# Altium PCB 333.PcbDoc (part 2 of 4)
Units mil, origin at the board's own origin, x right, y up, seen from the top; angles counter-clockwise.
Board outline 3897.64 x 5283.46 mil, 2 copper layers (Top Layer, Bottom Layer); 160 components, 17 nets, 480 pads, 300 vias.
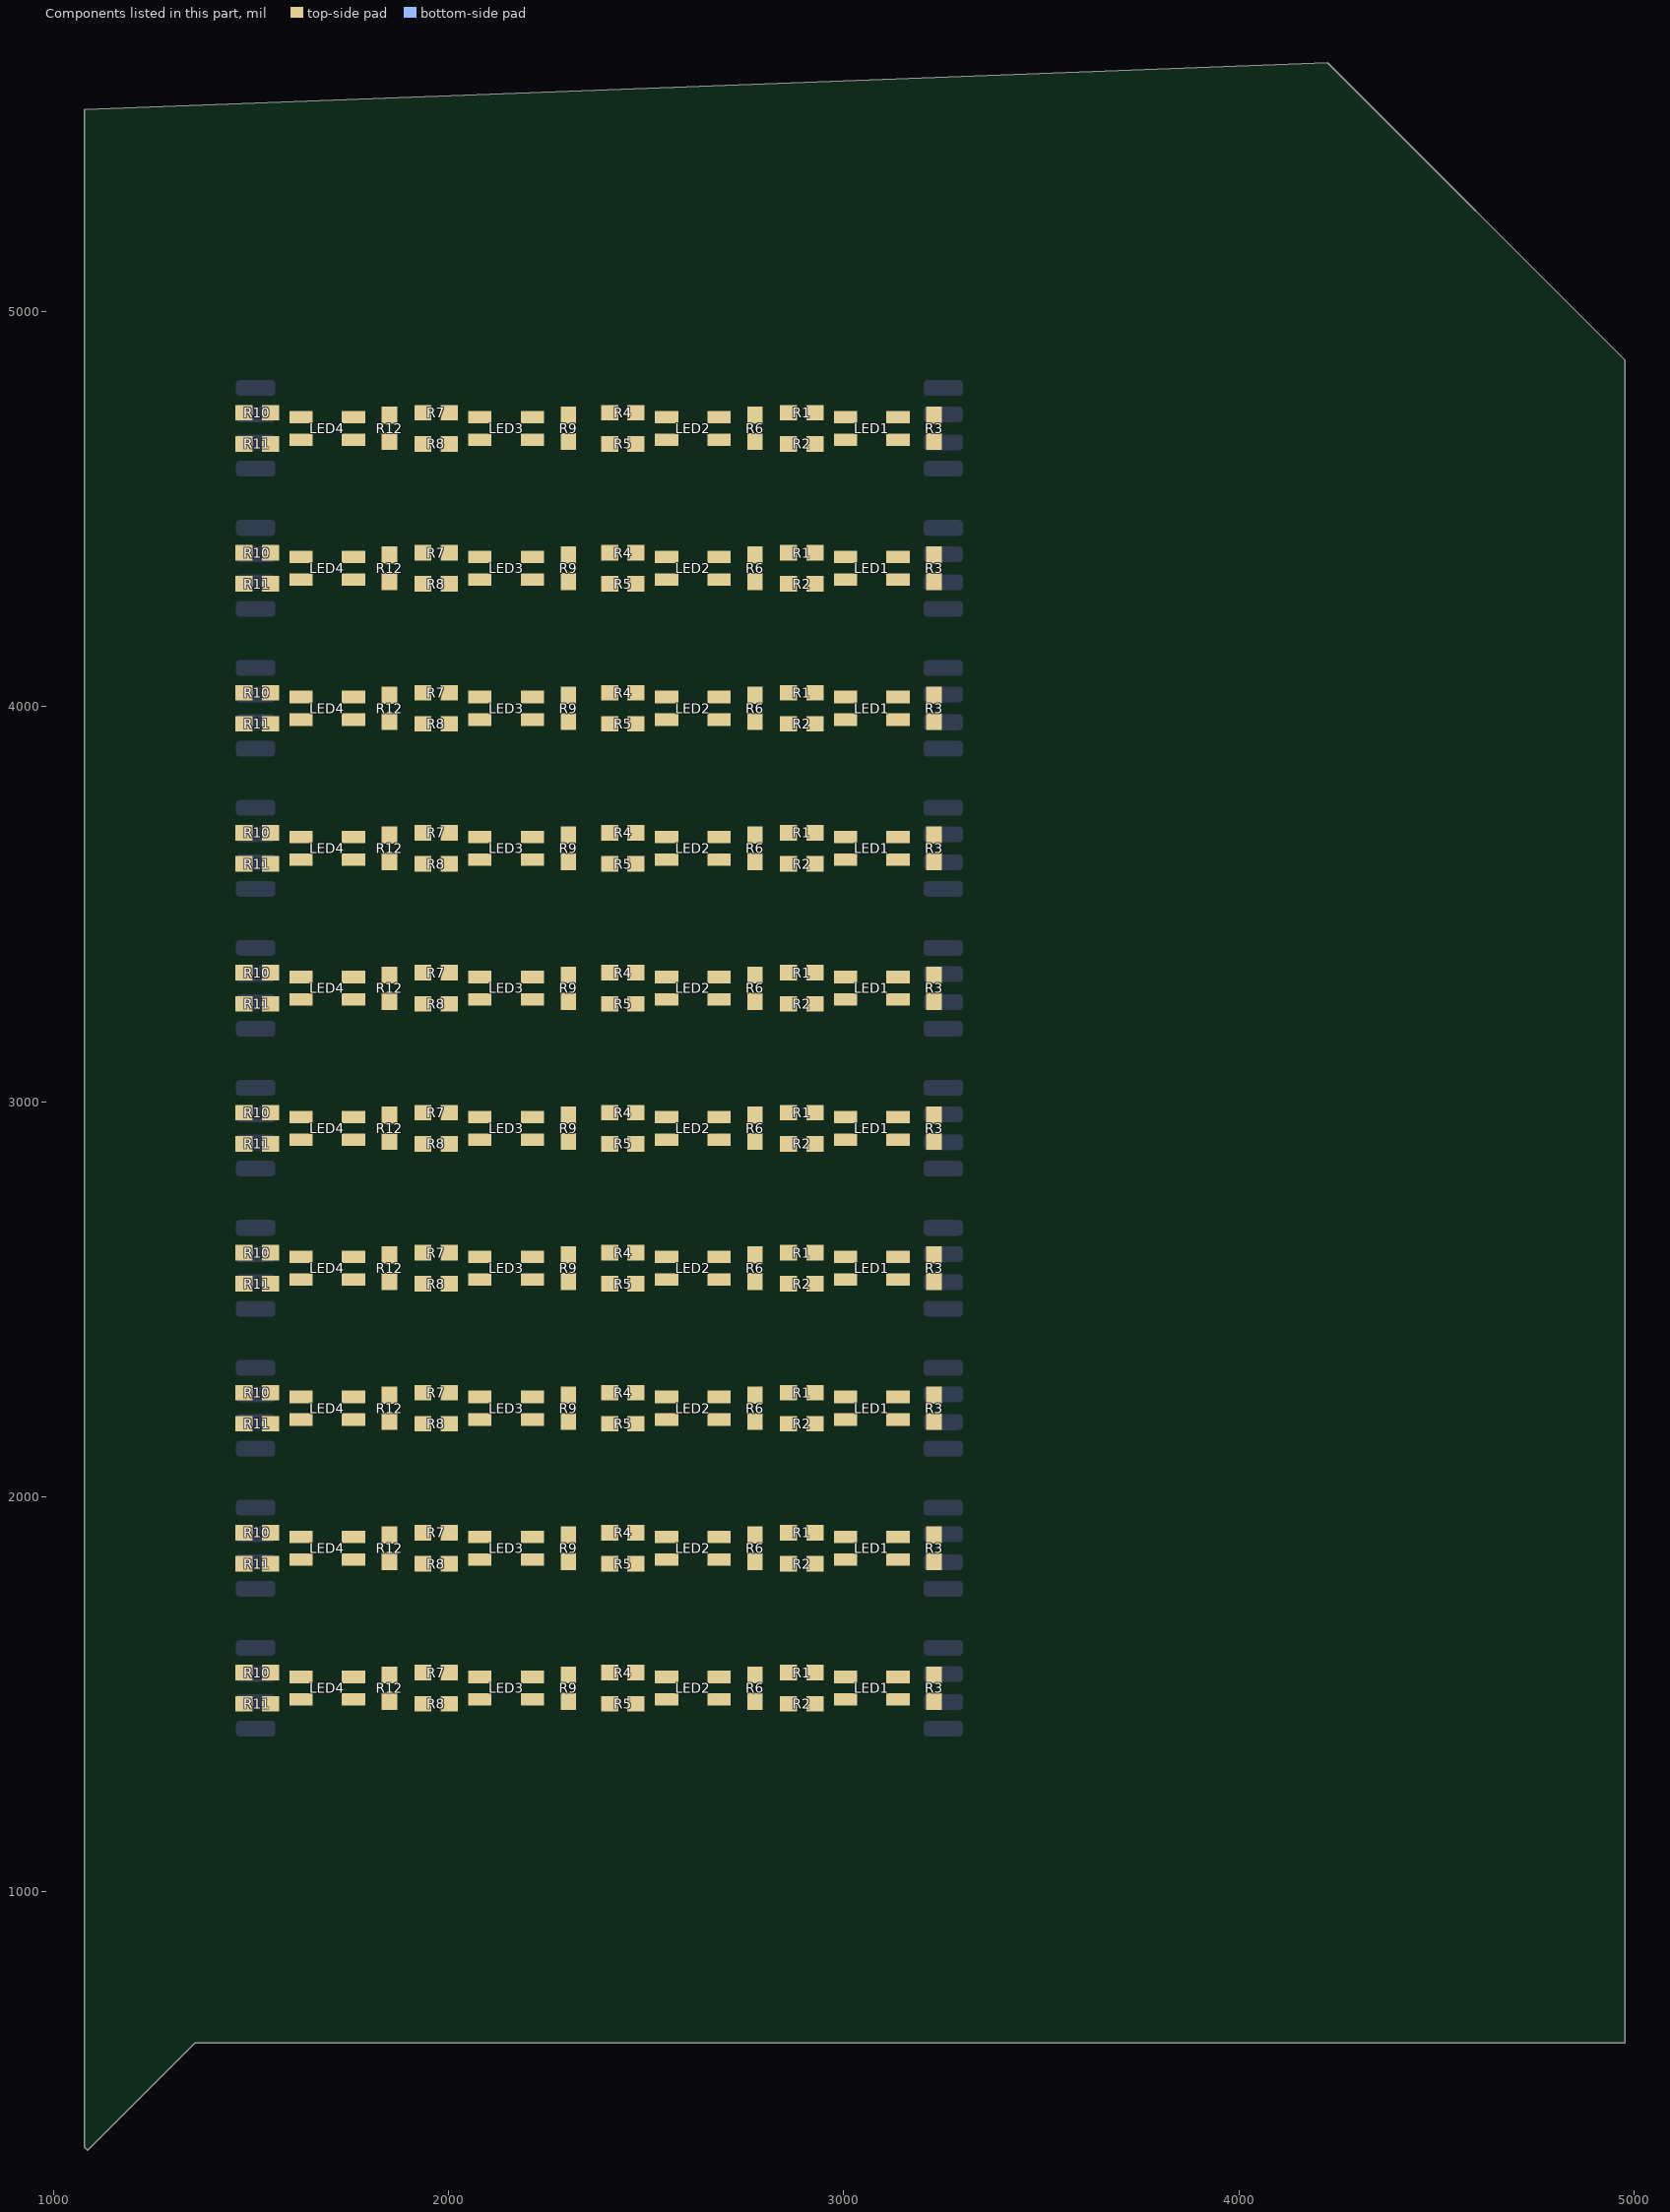
[diagram p2: the components of this part, seen from the top]

## Via types
v1: diameter 24, hole 12, Top Layer to Bottom Layer, 160 vias
v2: diameter 15, hole 15, Top Layer to Bottom Layer, 140 vias

## Nets (pads, with @x,y where several pads share a name; then routed paths per layer and width w, separated by ;. In a path a pad name is that pad's centre, name@x,y a point inside that pad or via, vN(x,y) a via of type N, cw(c..) or ccw(c..) an arc to the next point about the centre after c; other vN are vias at no path point) (continued)
copper on no net: (continued)
  Top Layer w15: 1471.08,1484.33 v1(1446.85,1446.85) ; 1471.08,1563.07 v1(1446.85,1525.59) ; 1471.08,2192.99 v1(1446.85,2155.51) ; 1471.08,2271.73 v1(1446.85,2234.25) ; 1471.08,2547.32 v1(1446.85,2509.84) ; 1471.08,2626.06 v1(1446.85,2588.58) ; 1471.08,2901.65 v1(1446.85,2864.17) ; 1471.08,2980.39 v1(1446.85,2942.91) ; 1471.08,3255.98 v1(1446.85,3218.5) ; 1471.08,3334.72 v1(1446.85,3297.24) ; 1471.08,3610.31 v1(1446.85,3572.83) ; 1471.08,3689.05 v1(1446.85,3651.57) ; 1471.08,3964.64 v1(1446.85,3927.17) ; 1471.08,4043.38 v1(1446.85,4005.91) ; 1471.08,4318.97 v1(1446.85,4281.5) ; 1471.08,4397.71 v1(1446.85,4360.24) ; 1471.08,4673.31 v1(1446.85,4635.83) ; 1471.08,4752.05 v1(1446.85,4714.57) ; 1480.31,1476.38 v1(1446.85,1446.85) ; 1480.31,1555.12 v1(1446.85,1525.59) ; 1480.31,2185.04 v1(1446.85,2155.51) ; 1480.31,2263.78 v1(1446.85,2234.25) ; 1480.31,2539.37 v1(1446.85,2509.84) ; 1480.31,2618.11 v1(1446.85,2588.58) ; 1480.31,2893.7 v1(1446.85,2864.17) ; 1480.31,2972.44 v1(1446.85,2942.91) ; 1480.31,3248.03 v1(1446.85,3218.5) ; 1480.31,3326.77 v1(1446.85,3297.24) ; 1480.31,3602.36 v1(1446.85,3572.83) ; 1480.31,3681.1 v1(1446.85,3651.57) ; 1480.31,3956.69 v1(1446.85,3927.17) ; 1480.31,4035.43 v1(1446.85,4005.91) ; 1480.31,4311.02 v1(1446.85,4281.5) ; 1480.31,4389.76 v1(1446.85,4360.24) ; 1480.31,4665.35 v1(1446.85,4635.83) ; 1480.31,4744.09 v1(1446.85,4714.57) ; 1482.28,1476.38 1476.38,1476.38 v1(1446.85,1446.85) ; 1482.28,1555.12 1476.38,1555.12 v1(1446.85,1525.59) ; 1482.28,2185.04 1476.38,2185.04 v1(1446.85,2155.51) ; 1482.28,2263.78 1476.38,2263.78 v1(1446.85,2234.25) ; 1482.28,2539.37 1476.38,2539.37 v1(1446.85,2509.84) ; 1482.28,2618.11 1476.38,2618.11 v1(1446.85,2588.58) ; 1482.28,2893.7 1476.38,2893.7 v1(1446.85,2864.17) ; 1482.28,2972.44 1476.38,2972.44 v1(1446.85,2942.91) ; 1482.28,3248.03 1476.38,3248.03 v1(1446.85,3218.5) ; 1482.28,3326.77 1476.38,3326.77 v1(1446.85,3297.24) ; 1482.28,3602.36 1476.38,3602.36 v1(1446.85,3572.83) ; 1482.28,3681.1 1476.38,3681.1 v1(1446.85,3651.57) ; 1482.28,3956.69 1476.38,3956.69 v1(1446.85,3927.17) ; 1482.28,4035.43 1476.38,4035.43 v1(1446.85,4005.91) ; 1482.28,4311.02 1476.38,4311.02 v1(1446.85,4281.5) ; 1482.28,4389.76 1476.38,4389.76 v1(1446.85,4360.24) ; 1482.28,4665.35 1476.38,4665.35 v1(1446.85,4635.83) ; 1482.28,4744.09 1476.38,4744.09 v1(1446.85,4714.57) ; 1487.05,1466.23 v1(1446.85,1446.85) ; 1487.05,1544.97 v1(1446.85,1525.59) ; 1487.05,2174.89 v1(1446.85,2155.51) ; 1487.05,2253.63 v1(1446.85,2234.25) ; 1487.05,2529.22 v1(1446.85,2509.84) ; 1487.05,2607.96 v1(1446.85,2588.58) ; 1487.05,2883.55 v1(1446.85,2864.17) ; 1487.05,2962.29 v1(1446.85,2942.91) ; 1487.05,3237.88 v1(1446.85,3218.5) ; 1487.05,3316.62 v1(1446.85,3297.24) ; 1487.05,3592.21 v1(1446.85,3572.83) ; 1487.05,3670.95 v1(1446.85,3651.57) ; 1487.05,3946.54 v1(1446.85,3927.17) ; 1487.05,4025.28 v1(1446.85,4005.91) ; 1487.05,4300.87 v1(1446.85,4281.5) ; 1487.05,4379.61 v1(1446.85,4360.24) ; 1487.05,4655.2 v1(1446.85,4635.83) ; 1487.05,4733.94 v1(1446.85,4714.57) ; 1549.21,1476.38 1574.8,1476.38 ; 1549.21,1555.12 1574.8,1555.12 ; 1549.21,2185.04 1574.8,2185.04 ; 1549.21,2263.78 1574.8,2263.78 ; 1549.21,2539.37 1574.8,2539.37 ; 1549.21,2618.11 1574.8,2618.11 ; 1549.21,2893.7 1574.8,2893.7 ; 1549.21,2972.44 1574.8,2972.44 ; 1549.21,3248.03 1574.8,3248.03 ; 1549.21,3326.77 1574.8,3326.77 ; 1549.21,3602.36 1574.8,3602.36 ; 1549.21,3681.1 1574.8,3681.1 ; 1549.21,3956.69 1574.8,3956.69 ; 1549.21,4035.43 1574.8,4035.43 ; 1549.21,4311.02 1574.8,4311.02 ; 1549.21,4389.76 1574.8,4389.76 ; 1549.21,4665.35 1574.8,4665.35 ; 1549.21,4744.09 1574.8,4744.09 ; 1549.54,1488.45 1585.63,1487.2 ; 1549.54,1543.04 1585.63,1544.29 ; 1549.54,2197.11 1585.63,2195.87 ; 1549.54,2251.71 1585.63,2252.95 ; 1549.54,2551.44 1585.63,2550.2 ; 1549.54,2606.04 1585.63,2607.28 ; 1549.54,2905.78 1585.63,2904.53 ; 1549.54,2960.37 1585.63,2961.61 ; 1549.54,3260.11 1585.63,3258.86 ; 1549.54,3314.7 1585.63,3315.94 ; 1549.54,3614.44 1585.63,3613.19 ; 1549.54,3669.03 1585.63,3670.28 ; 1549.54,3968.77 1585.63,3967.52 ; 1549.54,4023.36 1585.63,4024.61 ; 1549.54,4323.1 1585.63,4321.85 ; 1549.54,4377.69 1585.63,4378.94 ; 1549.54,4677.43 1585.63,4676.18 ; 1549.54,4732.02 1585.63,4733.27 ; 1556.74,1465.54 1585.63,1487.2 ; 1556.74,1565.96 1585.63,1544.29 ; 1556.74,2174.2 1585.63,2195.87 ; 1556.74,2274.62 1585.63,2252.95 ; 1556.74,2528.53 1585.63,2550.2 ; 1556.74,2628.95 1585.63,2607.28 ; 1556.74,2882.86 1585.63,2904.53 ; 1556.74,2983.28 1585.63,2961.61 ; 1556.74,3237.19 1585.63,3258.86 ; 1556.74,3337.61 1585.63,3315.94 ; 1556.74,3591.52 1585.63,3613.19 ; 1556.74,3691.94 1585.63,3670.28 ; 1556.74,3945.85 1585.63,3967.52 ; 1556.74,4046.27 1585.63,4024.61 ; 1556.74,4300.18 1585.63,4321.85 ; 1556.74,4400.61 1585.63,4378.94 ; 1556.74,4654.51 1585.63,4676.18 ; 1556.74,4754.94 1585.63,4733.27 ; 1611.37,1479.05 1585.63,1487.2 ; 1611.37,1495.36 1585.63,1487.2 ; 1611.37,1536.14 1585.63,1544.29 ; 1611.37,1552.44 1585.63,1544.29 ; 1611.37,2187.71 1585.63,2195.87 ; 1611.37,2204.02 1585.63,2195.87 ; 1611.37,2244.8 1585.63,2252.95 ; 1611.37,2261.1 1585.63,2252.95 ; 1611.37,2542.05 1585.63,2550.2 ; 1611.37,2558.35 1585.63,2550.2 ; 1611.37,2599.13 1585.63,2607.28 ; 1611.37,2615.43 1585.63,2607.28 ; 1611.37,2896.38 1585.63,2904.53 ; 1611.37,2912.68 1585.63,2904.53 ; 1611.37,2953.46 1585.63,2961.61 ; 1611.37,2969.77 1585.63,2961.61 ; 1611.37,3250.71 1585.63,3258.86 ; 1611.37,3267.01 1585.63,3258.86 ; 1611.37,3307.79 1585.63,3315.94 ; 1611.37,3324.1 1585.63,3315.94 ; 1611.37,3605.04 1585.63,3613.19 ; 1611.37,3621.34 1585.63,3613.19 ; 1611.37,3662.12 1585.63,3670.28 ; 1611.37,3678.43 1585.63,3670.28 ; 1611.37,3959.37 1585.63,3967.52 ; 1611.37,3975.67 1585.63,3967.52 ; 1611.37,4016.45 1585.63,4024.61 ; 1611.37,4032.76 1585.63,4024.61 ; 1611.37,4313.7 1585.63,4321.85 ; 1611.37,4330 1585.63,4321.85 ; 1611.37,4370.79 1585.63,4378.94 ; 1611.37,4387.09 1585.63,4378.94 ; 1611.37,4668.03 1585.63,4676.18 ; 1611.37,4684.33 1585.63,4676.18 ; 1611.37,4725.12 1585.63,4733.27 ; 1611.37,4741.42 1585.63,4733.27 ; 1612.63,1487.2 1585.63,1487.2 ; 1612.63,1544.29 1585.63,1544.29 ; 1612.63,2195.87 1585.63,2195.87 ; 1612.63,2252.95 1585.63,2252.95 ; 1612.63,2550.2 1585.63,2550.2 ; 1612.63,2607.28 1585.63,2607.28 ; 1612.63,2904.53 1585.63,2904.53 ; 1612.63,2961.61 1585.63,2961.61 ; 1612.63,3258.86 1585.63,3258.86 ; 1612.63,3315.94 1585.63,3315.94 ; 1612.63,3613.19 1585.63,3613.19 ; 1612.63,3670.28 1585.63,3670.28 ; 1612.63,3967.52 1585.63,3967.52 ; 1612.63,4024.61 1585.63,4024.61 ; 1612.63,4321.85 1585.63,4321.85 ; 1612.63,4378.94 1585.63,4378.94 ; 1612.63,4676.18 1585.63,4676.18 ; 1612.63,4733.27 1585.63,4733.27 ; 1626.41,1487.2 1585.63,1487.2 ; 1626.41,1544.29 1585.63,1544.29 ; 1626.41,2195.87 1585.63,2195.87 ; 1626.41,2252.95 1585.63,2252.95 ; 1626.41,2550.2 1585.63,2550.2 ; 1626.41,2607.28 1585.63,2607.28 ; 1626.41,2904.53 1585.63,2904.53 ; 1626.41,2961.61 1585.63,2961.61 ; 1626.41,3258.86 1585.63,3258.86 ; 1626.41,3315.94 1585.63,3315.94 ; 1626.41,3613.19 1585.63,3613.19 ; 1626.41,3670.28 1585.63,3670.28 ; 1626.41,3967.52 1585.63,3967.52 ; 1626.41,4024.61 1585.63,4024.61 ; 1626.41,4321.85 1585.63,4321.85 ; 1626.41,4378.94 1585.63,4378.94 ; 1626.41,4676.18 1585.63,4676.18 ; 1626.41,4733.27 1585.63,4733.27 ; v1(1702.76,1574.8) 1702.76,1555.12 1713.58,1544.29 ; v1(1702.76,2283.46) 1702.76,2263.78 1713.58,2252.95 ; v1(1702.76,2637.8) 1702.76,2618.11 1713.58,2607.28 ; v1(1702.76,2992.13) 1702.76,2972.44 1713.58,2961.61 ; v1(1702.76,3346.46) 1702.76,3326.77 1713.58,3315.94 ; v1(1702.76,3700.79) 1702.76,3681.1 1713.58,3670.28 ; v1(1702.76,4055.12) 1702.76,4035.43 1713.58,4024.61 ; v1(1702.76,4409.45) 1702.76,4389.76 1713.58,4378.94 ; v1(1702.76,4763.78) 1702.76,4744.09 1713.58,4733.27 ; 1744.57,1536.11 1713.58,1544.29 ; 1744.57,1552.47 1713.58,1544.29 ; 1744.57,2244.77 1713.58,2252.95 ; 1744.57,2261.13 1713.58,2252.95 ; 1744.57,2599.1 1713.58,2607.28 ; 1744.57,2615.46 1713.58,2607.28 ; 1744.57,2953.43 1713.58,2961.61 ; 1744.57,2969.79 1713.58,2961.61 ; 1744.57,3307.77 1713.58,3315.94 ; 1744.57,3324.12 1713.58,3315.94 ; 1744.57,3662.1 1713.58,3670.28 ; 1744.57,3678.45 1713.58,3670.28 ; 1744.57,4016.43 1713.58,4024.61 ; 1744.57,4032.79 1713.58,4024.61 ; 1744.57,4370.76 1713.58,4378.94 ; 1744.57,4387.12 1713.58,4378.94 ; 1744.57,4725.09 1713.58,4733.27 ; 1744.57,4741.45 1713.58,4733.27 ; 1745.63,1544.29 1713.58,1544.29 ; 1745.63,2252.95 1713.58,2252.95 ; 1745.63,2607.28 1713.58,2607.28 ; 1745.63,2961.61 1713.58,2961.61 ; 1745.63,3315.94 1713.58,3315.94 ; 1745.63,3670.28 1713.58,3670.28 ; 1745.63,4024.61 1713.58,4024.61 ; 1745.63,4378.94 1713.58,4378.94 ; 1745.63,4733.27 1713.58,4733.27 ; 1759.41,1487.2 1798.23,1487.2 ; 1759.41,1544.29 1713.58,1544.29 ; 1759.41,2195.87 1798.23,2195.87 ; 1759.41,2252.95 1713.58,2252.95 ; 1759.41,2550.2 1798.23,2550.2 ; 1759.41,2607.28 1713.58,2607.28 ; 1759.41,2904.53 1798.23,2904.53 ; 1759.41,2961.61 1713.58,2961.61 ; 1759.41,3258.86 1798.23,3258.86 ; 1759.41,3315.94 1713.58,3315.94 ; 1759.41,3613.19 1798.23,3613.19 ; 1759.41,3670.28 1713.58,3670.28 ; 1759.41,3967.52 1798.23,3967.52 ; 1759.41,4024.61 1713.58,4024.61 ; 1759.41,4321.85 1798.23,4321.85 ; 1759.41,4378.94 1713.58,4378.94 ; 1759.41,4676.18 1798.23,4676.18 ; 1759.41,4733.27 1713.58,4733.27 ; 1773.19,1487.2 1798.23,1487.2 ; 1773.19,2195.87 1798.23,2195.87 ; 1773.19,2550.2 1798.23,2550.2 ; 1773.19,2904.53 1798.23,2904.53 ; 1773.19,3258.86 1798.23,3258.86 ; 1773.19,3613.19 1798.23,3613.19 ; 1773.19,3967.52 1798.23,3967.52 ; 1773.19,4321.85 1798.23,4321.85 ; 1773.19,4676.18 1798.23,4676.18 ; 1774.55,1479.07 1798.23,1487.2 ; 1774.55,1495.34 1798.23,1487.2 ; 1774.55,2187.73 1798.23,2195.87 ; 1774.55,2204 1798.23,2195.87 ; 1774.55,2542.06 1798.23,2550.2 ; 1774.55,2558.33 1798.23,2550.2 ; 1774.55,2896.39 1798.23,2904.53 ; 1774.55,2912.66 1798.23,2904.53 ; 1774.55,3250.72 1798.23,3258.86 ; 1774.55,3266.99 1798.23,3258.86 ; 1774.55,3605.05 1798.23,3613.19 ; 1774.55,3621.32 1798.23,3613.19 ; 1774.55,3959.38 1798.23,3967.52 ; 1774.55,3975.65 1798.23,3967.52 ; 1774.55,4313.72 1798.23,4321.85 ; 1774.55,4329.99 1798.23,4321.85 ; 1774.55,4668.05 1798.23,4676.18 ; 1774.55,4684.32 1798.23,4676.18 ; 1847.88,1537.29 1820.87,1549.21 ; 1847.88,1561.14 1820.87,1549.21 ; 1847.88,2245.95 1820.87,2257.87 ; 1847.88,2269.8 1820.87,2257.87 ; 1847.88,2600.28 1820.87,2612.2 ; 1847.88,2624.13 1820.87,2612.2 ; 1847.88,2954.61 1820.87,2966.54 ; 1847.88,2978.46 1820.87,2966.54 ; 1847.88,3308.94 1820.87,3320.87 ; 1847.88,3332.79 1820.87,3320.87 ; 1847.88,3663.27 1820.87,3675.2 ; 1847.88,3687.12 1820.87,3675.2 ; 1847.88,4017.6 1820.87,4029.53 ; 1847.88,4041.45 1820.87,4029.53 ; 1847.88,4371.94 1820.87,4383.86 ; 1847.88,4395.78 1820.87,4383.86 ; 1847.88,4726.27 1820.87,4738.19 ; 1847.88,4750.11 1820.87,4738.19 ; 1850.39,1549.21 1820.87,1549.21 ; 1850.39,2257.87 1820.87,2257.87 ; 1850.39,2612.2 1820.87,2612.2 ; 1850.39,2966.54 1820.87,2966.54 ; 1850.39,3320.87 1820.87,3320.87 ; 1850.39,3675.2 1820.87,3675.2 ; 1850.39,4029.53 1820.87,4029.53 ; 1850.39,4383.86 1820.87,4383.86 ; 1850.39,4738.19 1820.87,4738.19 ; 1923.84,1484.33 v1(1899.61,1446.85) ; 1923.84,1563.07 v1(1899.61,1525.59) ; 1923.84,2192.99 v1(1899.61,2155.51) ; 1923.84,2271.73 v1(1899.61,2234.25) ; 1923.84,2547.32 v1(1899.61,2509.84) ; 1923.84,2626.06 v1(1899.61,2588.58) ; 1923.84,2901.65 v1(1899.61,2864.17) ; 1923.84,2980.39 v1(1899.61,2942.91) ; 1923.84,3255.98 v1(1899.61,3218.5) ; 1923.84,3334.72 v1(1899.61,3297.24) ; 1923.84,3610.31 v1(1899.61,3572.83) ; 1923.84,3689.05 v1(1899.61,3651.57) ; 1923.84,3964.64 v1(1899.61,3927.17) ; 1923.84,4043.38 v1(1899.61,4005.91) ; 1923.84,4318.97 v1(1899.61,4281.5) ; 1923.84,4397.71 v1(1899.61,4360.24) ; 1923.84,4673.31 v1(1899.61,4635.83) ; 1923.84,4752.05 v1(1899.61,4714.57) ; 1933.07,1476.38 v1(1899.61,1446.85) ; 1933.07,1555.12 v1(1899.61,1525.59) ; 1933.07,2185.04 v1(1899.61,2155.51) ; 1933.07,2263.78 v1(1899.61,2234.25) ; 1933.07,2539.37 v1(1899.61,2509.84) ; 1933.07,2618.11 v1(1899.61,2588.58) ; 1933.07,2893.7 v1(1899.61,2864.17) ; 1933.07,2972.44 v1(1899.61,2942.91) ; 1933.07,3248.03 v1(1899.61,3218.5) ; 1933.07,3326.77 v1(1899.61,3297.24) ; 1933.07,3602.36 v1(1899.61,3572.83) ; 1933.07,3681.1 v1(1899.61,3651.57) ; 1933.07,3956.69 v1(1899.61,3927.17) ; 1933.07,4035.43 v1(1899.61,4005.91) ; 1933.07,4311.02 v1(1899.61,4281.5) ; 1933.07,4389.76 v1(1899.61,4360.24) ; 1933.07,4665.35 v1(1899.61,4635.83) ; 1933.07,4744.09 v1(1899.61,4714.57) ; 1935.04,1476.38 1929.13,1476.38 v1(1899.61,1446.85) ; 1935.04,1555.12 1929.13,1555.12 v1(1899.61,1525.59) ; 1935.04,2185.04 1929.13,2185.04 v1(1899.61,2155.51) ; 1935.04,2263.78 1929.13,2263.78 v1(1899.61,2234.25) ; 1935.04,2539.37 1929.13,2539.37 v1(1899.61,2509.84) ; 1935.04,2618.11 1929.13,2618.11 v1(1899.61,2588.58) ; 1935.04,2893.7 1929.13,2893.7 v1(1899.61,2864.17) ; 1935.04,2972.44 1929.13,2972.44 v1(1899.61,2942.91) ; 1935.04,3248.03 1929.13,3248.03 v1(1899.61,3218.5) ; 1935.04,3326.77 1929.13,3326.77 v1(1899.61,3297.24) ; 1935.04,3602.36 1929.13,3602.36 v1(1899.61,3572.83) ; 1935.04,3681.1 1929.13,3681.1 v1(1899.61,3651.57) ; 1935.04,3956.69 1929.13,3956.69 v1(1899.61,3927.17) ; 1935.04,4035.43 1929.13,4035.43 v1(1899.61,4005.91) ; 1935.04,4311.02 1929.13,4311.02 v1(1899.61,4281.5) ; 1935.04,4389.76 1929.13,4389.76 v1(1899.61,4360.24) ; 1935.04,4665.35 1929.13,4665.35 v1(1899.61,4635.83) ; 1935.04,4744.09 1929.13,4744.09 v1(1899.61,4714.57) ; 1939.81,1466.23 v1(1899.61,1446.85) ; 1939.81,1544.97 v1(1899.61,1525.59) ; 1939.81,2174.89 v1(1899.61,2155.51) ; 1939.81,2253.63 v1(1899.61,2234.25) ; 1939.81,2529.22 v1(1899.61,2509.84) ; 1939.81,2607.96 v1(1899.61,2588.58) ; 1939.81,2883.55 v1(1899.61,2864.17) ; 1939.81,2962.29 v1(1899.61,2942.91) ; 1939.81,3237.88 v1(1899.61,3218.5) ; 1939.81,3316.62 v1(1899.61,3297.24) ; 1939.81,3592.21 v1(1899.61,3572.83) ; 1939.81,3670.95 v1(1899.61,3651.57) ; 1939.81,3946.54 v1(1899.61,3927.17) ; 1939.81,4025.28 v1(1899.61,4005.91) ; 1939.81,4300.87 v1(1899.61,4281.5) ; 1939.81,4379.61 v1(1899.61,4360.24) ; 1939.81,4655.2 v1(1899.61,4635.83) ; 1939.81,4733.94 v1(1899.61,4714.57) ; 2001.97,1476.38 2027.56,1476.38 ; 2001.97,1555.12 2027.56,1555.12 ; 2001.97,2185.04 2027.56,2185.04 ; 2001.97,2263.78 2027.56,2263.78 ; 2001.97,2539.37 2027.56,2539.37 ; 2001.97,2618.11 2027.56,2618.11 ; 2001.97,2893.7 2027.56,2893.7 ; 2001.97,2972.44 2027.56,2972.44 ; 2001.97,3248.03 2027.56,3248.03 ; 2001.97,3326.77 2027.56,3326.77 ; 2001.97,3602.36 2027.56,3602.36 ; 2001.97,3681.1 2027.56,3681.1 ; 2001.97,3956.69 2027.56,3956.69 ; 2001.97,4035.43 2027.56,4035.43 ; 2001.97,4311.02 2027.56,4311.02 ; 2001.97,4389.76 2027.56,4389.76 ; 2001.97,4665.35 2027.56,4665.35 ; 2001.97,4744.09 2027.56,4744.09 ; 2002.3,1488.45 2038.39,1487.2 ; 2002.3,1543.04 2038.39,1544.29 ; 2002.3,2197.11 2038.39,2195.87 ; 2002.3,2251.71 2038.39,2252.95 ; 2002.3,2551.44 2038.39,2550.2 ; 2002.3,2606.04 2038.39,2607.28 ; 2002.3,2905.78 2038.39,2904.53 ; 2002.3,2960.37 2038.39,2961.61 ; 2002.3,3260.11 2038.39,3258.86 ; 2002.3,3314.7 2038.39,3315.94 ; 2002.3,3614.44 2038.39,3613.19 ; 2002.3,3669.03 2038.39,3670.28 ; 2002.3,3968.77 2038.39,3967.52 ; 2002.3,4023.36 2038.39,4024.61 ; 2002.3,4323.1 2038.39,4321.85 ; 2002.3,4377.69 2038.39,4378.94 ; 2002.3,4677.43 2038.39,4676.18 ; 2002.3,4732.02 2038.39,4733.27 ; 2009.5,1465.54 2038.39,1487.2 ; 2009.5,1565.96 2038.39,1544.29 ; 2009.5,2174.2 2038.39,2195.87 ; 2009.5,2274.62 2038.39,2252.95 ; 2009.5,2528.53 2038.39,2550.2 ; 2009.5,2628.95 2038.39,2607.28 ; 2009.5,2882.86 2038.39,2904.53 ; 2009.5,2983.28 2038.39,2961.61 ; 2009.5,3237.19 2038.39,3258.86 ; 2009.5,3337.61 2038.39,3315.94 ; 2009.5,3591.52 2038.39,3613.19 ; 2009.5,3691.94 2038.39,3670.28 ; 2009.5,3945.85 2038.39,3967.52 ; 2009.5,4046.27 2038.39,4024.61 ; 2009.5,4300.18 2038.39,4321.85 ; 2009.5,4400.61 2038.39,4378.94 ; 2009.5,4654.51 2038.39,4676.18 ; 2009.5,4754.94 2038.39,4733.27 ; 2064.13,1479.05 2038.39,1487.2 ; 2064.13,1495.36 2038.39,1487.2 ; 2064.13,1536.14 2038.39,1544.29 ; 2064.13,1552.44 2038.39,1544.29 ; 2064.13,2187.71 2038.39,2195.87 ; 2064.13,2204.02 2038.39,2195.87 ; 2064.13,2244.8 2038.39,2252.95 ; 2064.13,2261.1 2038.39,2252.95 ; 2064.13,2542.05 2038.39,2550.2 ; 2064.13,2558.35 2038.39,2550.2 ; 2064.13,2599.13 2038.39,2607.28 ; 2064.13,2615.43 2038.39,2607.28 ; 2064.13,2896.38 2038.39,2904.53 ; 2064.13,2912.68 2038.39,2904.53 ; 2064.13,2953.46 2038.39,2961.61 ; 2064.13,2969.77 2038.39,2961.61 ; 2064.13,3250.71 2038.39,3258.86 ; 2064.13,3267.01 2038.39,3258.86 ; 2064.13,3307.79 2038.39,3315.94 ; 2064.13,3324.1 2038.39,3315.94 ; 2064.13,3605.04 2038.39,3613.19 ; 2064.13,3621.34 2038.39,3613.19 ; 2064.13,3662.12 2038.39,3670.28 ; 2064.13,3678.43 2038.39,3670.28 ; 2064.13,3959.37 2038.39,3967.52 ; 2064.13,3975.67 2038.39,3967.52 ; 2064.13,4016.45 2038.39,4024.61 ; 2064.13,4032.76 2038.39,4024.61 ; 2064.13,4313.7 2038.39,4321.85 ; 2064.13,4330 2038.39,4321.85 ; 2064.13,4370.79 2038.39,4378.94 ; 2064.13,4387.09 2038.39,4378.94 ; 2064.13,4668.03 2038.39,4676.18 ; 2064.13,4684.33 2038.39,4676.18 ; 2064.13,4725.12 2038.39,4733.27 ; 2064.13,4741.42 2038.39,4733.27 ; 2065.39,1487.2 2038.39,1487.2 ; 2065.39,1544.29 2038.39,1544.29 ; 2065.39,2195.87 2038.39,2195.87 ; 2065.39,2252.95 2038.39,2252.95 ; 2065.39,2550.2 2038.39,2550.2 ; 2065.39,2607.28 2038.39,2607.28 ; 2065.39,2904.53 2038.39,2904.53 ; 2065.39,2961.61 2038.39,2961.61 ; 2065.39,3258.86 2038.39,3258.86 ; 2065.39,3315.94 2038.39,3315.94 ; 2065.39,3613.19 2038.39,3613.19 ; 2065.39,3670.28 2038.39,3670.28 ; 2065.39,3967.52 2038.39,3967.52 ; 2065.39,4024.61 2038.39,4024.61 ; 2065.39,4321.85 2038.39,4321.85 ; 2065.39,4378.94 2038.39,4378.94 ; 2065.39,4676.18 2038.39,4676.18 ; 2065.39,4733.27 2038.39,4733.27 ; 2079.17,1487.2 2038.39,1487.2 ; 2079.17,1544.29 2038.39,1544.29 ; 2079.17,2195.87 2038.39,2195.87 ; 2079.17,2252.95 2038.39,2252.95 ; 2079.17,2550.2 2038.39,2550.2 ; 2079.17,2607.28 2038.39,2607.28 ; 2079.17,2904.53 2038.39,2904.53 ; 2079.17,2961.61 2038.39,2961.61 ; 2079.17,3258.86 2038.39,3258.86 ; 2079.17,3315.94 2038.39,3315.94 ; 2079.17,3613.19 2038.39,3613.19 ; 2079.17,3670.28 2038.39,3670.28 ; 2079.17,3967.52 2038.39,3967.52 ; 2079.17,4024.61 2038.39,4024.61 ; 2079.17,4321.85 2038.39,4321.85 ; 2079.17,4378.94 2038.39,4378.94 ; 2079.17,4676.18 2038.39,4676.18 ; 2079.17,4733.27 2038.39,4733.27 ; v1(2155.51,1574.8) 2155.51,1555.12 2166.34,1544.29 ; v1(2155.51,2283.46) 2155.51,2263.78 2166.34,2252.95 ; v1(2155.51,2637.8) 2155.51,2618.11 2166.34,2607.28 ; v1(2155.51,2992.13) 2155.51,2972.44 2166.34,2961.61 ; v1(2155.51,3346.46) 2155.51,3326.77 2166.34,3315.94 ; v1(2155.51,3700.79) 2155.51,3681.1 2166.34,3670.28 ; v1(2155.51,4055.12) 2155.51,4035.43 2166.34,4024.61 ; v1(2155.51,4409.45) 2155.51,4389.76 2166.34,4378.94 ; v1(2155.51,4763.78) 2155.51,4744.09 2166.34,4733.27 ; 2197.33,1536.11 2166.34,1544.29 ; 2197.33,1552.47 2166.34,1544.29 ; 2197.33,2244.77 2166.34,2252.95 ; 2197.33,2261.13 2166.34,2252.95 ; 2197.33,2599.1 2166.34,2607.28 ; 2197.33,2615.46 2166.34,2607.28 ; 2197.33,2953.43 2166.34,2961.61 ; 2197.33,2969.79 2166.34,2961.61 ; 2197.33,3307.77 2166.34,3315.94 ; 2197.33,3324.12 2166.34,3315.94 ; 2197.33,3662.1 2166.34,3670.28 ; 2197.33,3678.45 2166.34,3670.28 ; 2197.33,4016.43 2166.34,4024.61 ; 2197.33,4032.79 2166.34,4024.61 ; 2197.33,4370.76 2166.34,4378.94 ; 2197.33,4387.12 2166.34,4378.94 ; 2197.33,4725.09 2166.34,4733.27 ; 2197.33,4741.45 2166.34,4733.27 ; 2198.39,1544.29 2166.34,1544.29 ; 2198.39,2252.95 2166.34,2252.95 ; 2198.39,2607.28 2166.34,2607.28 ; 2198.39,2961.61 2166.34,2961.61 ; 2198.39,3315.94 2166.34,3315.94 ; 2198.39,3670.28 2166.34,3670.28 ; 2198.39,4024.61 2166.34,4024.61 ; 2198.39,4378.94 2166.34,4378.94 ; 2198.39,4733.27 2166.34,4733.27 ; 2212.17,1487.2 2250.98,1487.2 ; 2212.17,1544.29 2166.34,1544.29 ; 2212.17,2195.87 2250.98,2195.87 ; 2212.17,2252.95 2166.34,2252.95 ; 2212.17,2550.2 2250.98,2550.2 ; 2212.17,2607.28 2166.34,2607.28 ; 2212.17,2904.53 2250.98,2904.53 ; 2212.17,2961.61 2166.34,2961.61 ; 2212.17,3258.86 2250.98,3258.86 ; 2212.17,3315.94 2166.34,3315.94 ; 2212.17,3613.19 2250.98,3613.19 ; 2212.17,3670.28 2166.34,3670.28 ; 2212.17,3967.52 2250.98,3967.52 ; 2212.17,4024.61 2166.34,4024.61 ; 2212.17,4321.85 2250.98,4321.85 ; 2212.17,4378.94 2166.34,4378.94 ; 2212.17,4676.18 2250.98,4676.18 ; 2212.17,4733.27 2166.34,4733.27 ; 2225.95,1487.2 2250.98,1487.2 ; 2225.95,2195.87 2250.98,2195.87 ; 2225.95,2550.2 2250.98,2550.2 ; 2225.95,2904.53 2250.98,2904.53 ; 2225.95,3258.86 2250.98,3258.86 ; 2225.95,3613.19 2250.98,3613.19 ; 2225.95,3967.52 2250.98,3967.52 ; 2225.95,4321.85 2250.98,4321.85 ; 2225.95,4676.18 2250.98,4676.18 ; 2227.31,1479.07 2250.98,1487.2 ; 2227.31,1495.34 2250.98,1487.2 ; 2227.31,2187.73 2250.98,2195.87 ; 2227.31,2204 2250.98,2195.87 ; 2227.31,2542.06 2250.98,2550.2 ; 2227.31,2558.33 2250.98,2550.2 ; 2227.31,2896.39 2250.98,2904.53 ; 2227.31,2912.66 2250.98,2904.53 ; 2227.31,3250.72 2250.98,3258.86 ; 2227.31,3266.99 2250.98,3258.86 ; 2227.31,3605.05 2250.98,3613.19 ; 2227.31,3621.32 2250.98,3613.19 ; 2227.31,3959.38 2250.98,3967.52 ; 2227.31,3975.65 2250.98,3967.52 ; 2227.31,4313.72 2250.98,4321.85 ; 2227.31,4329.99 2250.98,4321.85 ; 2227.31,4668.05 2250.98,4676.18 ; 2227.31,4684.32 2250.98,4676.18 ; 2300.64,1537.29 2273.62,1549.21 ; 2300.64,1561.14 2273.62,1549.21 ; 2300.64,2245.95 2273.62,2257.87 ; 2300.64,2269.8 2273.62,2257.87 ; 2300.64,2600.28 2273.62,2612.2 ; 2300.64,2624.13 2273.62,2612.2 ; 2300.64,2954.61 2273.62,2966.54 ; 2300.64,2978.46 2273.62,2966.54 ; 2300.64,3308.94 2273.62,3320.87 ; 2300.64,3332.79 2273.62,3320.87 ; 2300.64,3663.27 2273.62,3675.2 ; 2300.64,3687.12 2273.62,3675.2 ; 2300.64,4017.6 2273.62,4029.53 ; 2300.64,4041.45 2273.62,4029.53 ; 2300.64,4371.94 2273.62,4383.86 ; 2300.64,4395.78 2273.62,4383.86 ; 2300.64,4726.27 2273.62,4738.19 ; 2300.64,4750.11 2273.62,4738.19 ; 2303.15,1549.21 2273.62,1549.21 ; 2303.15,2257.87 2273.62,2257.87 ; 2303.15,2612.2 2273.62,2612.2 ; 2303.15,2966.54 2273.62,2966.54 ; 2303.15,3320.87 2273.62,3320.87 ; 2303.15,3675.2 2273.62,3675.2 ; 2303.15,4029.53 2273.62,4029.53 ; 2303.15,4383.86 2273.62,4383.86 ; 2303.15,4738.19 2273.62,4738.19 ; 2396.28,1484.33 v1(2372.05,1446.85) ; 2396.28,1563.07 v1(2372.05,1525.59) ; 2396.28,2192.99 v1(2372.05,2155.51) ; 2396.28,2271.73 v1(2372.05,2234.25) ; 2396.28,2547.32 v1(2372.05,2509.84) ; 2396.28,2626.06 v1(2372.05,2588.58) ; 2396.28,2901.65 v1(2372.05,2864.17) ; 2396.28,2980.39 v1(2372.05,2942.91) ; 2396.28,3255.98 v1(2372.05,3218.5) ; 2396.28,3334.72 v1(2372.05,3297.24) ; 2396.28,3610.31 v1(2372.05,3572.83) ; 2396.28,3689.05 v1(2372.05,3651.57) ; 2396.28,3964.64 v1(2372.05,3927.17) ; 2396.28,4043.38 v1(2372.05,4005.91) ; 2396.28,4318.97 v1(2372.05,4281.5) ; 2396.28,4397.71 v1(2372.05,4360.24) ; 2396.28,4673.31 v1(2372.05,4635.83) ; 2396.28,4752.05 v1(2372.05,4714.57) ; 2405.51,1476.38 v1(2372.05,1446.85) ; 2405.51,1555.12 v1(2372.05,1525.59) ; 2405.51,2185.04 v1(2372.05,2155.51) ; 2405.51,2263.78 v1(2372.05,2234.25) ; 2405.51,2539.37 v1(2372.05,2509.84) ; 2405.51,2618.11 v1(2372.05,2588.58) ; 2405.51,2893.7 v1(2372.05,2864.17) ; 2405.51,2972.44 v1(2372.05,2942.91) ; 2405.51,3248.03 v1(2372.05,3218.5) ; 2405.51,3326.77 v1(2372.05,3297.24) ; 2405.51,3602.36 v1(2372.05,3572.83) ; 2405.51,3681.1 v1(2372.05,3651.57) ; 2405.51,3956.69 v1(2372.05,3927.17) ; 2405.51,4035.43 v1(2372.05,4005.91) ; 2405.51,4311.02 v1(2372.05,4281.5) ; 2405.51,4389.76 v1(2372.05,4360.24) ; 2405.51,4665.35 v1(2372.05,4635.83) ; 2405.51,4744.09 v1(2372.05,4714.57) ; 2407.48,1476.38 2401.57,1476.38 v1(2372.05,1446.85) ; 2407.48,1555.12 2401.57,1555.12 v1(2372.05,1525.59) ; 2407.48,2185.04 2401.57,2185.04 v1(2372.05,2155.51) ; 2407.48,2263.78 2401.57,2263.78 v1(2372.05,2234.25) ; 2407.48,2539.37 2401.57,2539.37 v1(2372.05,2509.84) ; 2407.48,2618.11 2401.57,2618.11 v1(2372.05,2588.58) ; 2407.48,2893.7 2401.57,2893.7 v1(2372.05,2864.17) ; 2407.48,2972.44 2401.57,2972.44 v1(2372.05,2942.91) ; 2407.48,3248.03 2401.57,3248.03 v1(2372.05,3218.5) ; 2407.48,3326.77 2401.57,3326.77 v1(2372.05,3297.24) ; 2407.48,3602.36 2401.57,3602.36 v1(2372.05,3572.83) ; 2407.48,3681.1 2401.57,3681.1 v1(2372.05,3651.57) ; 2407.48,3956.69 2401.57,3956.69 v1(2372.05,3927.17) ; 2407.48,4035.43 2401.57,4035.43 v1(2372.05,4005.91) ; 2407.48,4311.02 2401.57,4311.02 v1(2372.05,4281.5) ; 2407.48,4389.76 2401.57,4389.76 v1(2372.05,4360.24) ; 2407.48,4665.35 2401.57,4665.35 v1(2372.05,4635.83) ; 2407.48,4744.09 2401.57,4744.09 v1(2372.05,4714.57) ; 2412.25,1466.23 v1(2372.05,1446.85) ; 2412.25,1544.97 v1(2372.05,1525.59) ; 2412.25,2174.89 v1(2372.05,2155.51) ; 2412.25,2253.63 v1(2372.05,2234.25) ; 2412.25,2529.22 v1(2372.05,2509.84) ; 2412.25,2607.96 v1(2372.05,2588.58) ; 2412.25,2883.55 v1(2372.05,2864.17) ; 2412.25,2962.29 v1(2372.05,2942.91) ; 2412.25,3237.88 v1(2372.05,3218.5) ; 2412.25,3316.62 v1(2372.05,3297.24) ; 2412.25,3592.21 v1(2372.05,3572.83) ; 2412.25,3670.95 v1(2372.05,3651.57) ; 2412.25,3946.54 v1(2372.05,3927.17) ; 2412.25,4025.28 v1(2372.05,4005.91) ; 2412.25,4300.87 v1(2372.05,4281.5) ; 2412.25,4379.61 v1(2372.05,4360.24) ; 2412.25,4655.2 v1(2372.05,4635.83) ; 2412.25,4733.94 v1(2372.05,4714.57) ; 2474.41,1476.38 2500,1476.38 ; 2474.41,1555.12 2500,1555.12 ; 2474.41,2185.04 2500,2185.04 ; 2474.41,2263.78 2500,2263.78 ; 2474.41,2539.37 2500,2539.37 ; 2474.41,2618.11 2500,2618.11 ; 2474.41,2893.7 2500,2893.7 ; 2474.41,2972.44 2500,2972.44 ; 2474.41,3248.03 2500,3248.03 ; 2474.41,3326.77 2500,3326.77 ; 2474.41,3602.36 2500,3602.36 ; 2474.41,3681.1 2500,3681.1 ; 2474.41,3956.69 2500,3956.69 ; 2474.41,4035.43 2500,4035.43 ; 2474.41,4311.02 2500,4311.02 ; 2474.41,4389.76 2500,4389.76 ; 2474.41,4665.35 2500,4665.35 ; 2474.41,4744.09 2500,4744.09 ; 2474.74,1488.45 2510.83,1487.2 ; 2474.74,1543.04 2510.83,1544.29 ; 2474.74,2197.11 2510.83,2195.87 ; 2474.74,2251.71 2510.83,2252.95 ; 2474.74,2551.44 2510.83,2550.2 ; 2474.74,2606.04 2510.83,2607.28 ; 2474.74,2905.78 2510.83,2904.53 ; 2474.74,2960.37 2510.83,2961.61 ; 2474.74,3260.11 2510.83,3258.86 ; 2474.74,3314.7 2510.83,3315.94 ; 2474.74,3614.44 2510.83,3613.19 ; 2474.74,3669.03 2510.83,3670.28 ; 2474.74,3968.77 2510.83,3967.52 ; 2474.74,4023.36 2510.83,4024.61 ; 2474.74,4323.1 2510.83,4321.85 ; 2474.74,4377.69 2510.83,4378.94 ; 2474.74,4677.43 2510.83,4676.18 ; 2474.74,4732.02 2510.83,4733.27 ; 2481.94,1465.54 2510.83,1487.2 ; 2481.94,1565.96 2510.83,1544.29 ; 2481.94,2174.2 2510.83,2195.87 ; 2481.94,2274.62 2510.83,2252.95 ; 2481.94,2528.53 2510.83,2550.2 ; 2481.94,2628.95 2510.83,2607.28 ; 2481.94,2882.86 2510.83,2904.53 ; 2481.94,2983.28 2510.83,2961.61 ; 2481.94,3237.19 2510.83,3258.86 ; 2481.94,3337.61 2510.83,3315.94 ; 2481.94,3591.52 2510.83,3613.19 ; 2481.94,3691.94 2510.83,3670.28 ; 2481.94,3945.85 2510.83,3967.52 ; 2481.94,4046.27 2510.83,4024.61 ; 2481.94,4300.18 2510.83,4321.85 ; 2481.94,4400.61 2510.83,4378.94 ; 2481.94,4654.51 2510.83,4676.18 ; 2481.94,4754.94 2510.83,4733.27 ; 2536.57,1479.05 2510.83,1487.2 ; 2536.57,1495.36 2510.83,1487.2 ; 2536.57,1536.14 2510.83,1544.29 ; 2536.57,1552.44 2510.83,1544.29 ; 2536.57,2187.71 2510.83,2195.87 ; 2536.57,2204.02 2510.83,2195.87 ; 2536.57,2244.8 2510.83,2252.95 ; 2536.57,2261.1 2510.83,2252.95 ; 2536.57,2542.05 2510.83,2550.2 ; 2536.57,2558.35 2510.83,2550.2 ; 2536.57,2599.13 2510.83,2607.28 ; 2536.57,2615.43 2510.83,2607.28 ; 2536.57,2896.38 2510.83,2904.53 ; 2536.57,2912.68 2510.83,2904.53 ; 2536.57,2953.46 2510.83,2961.61 ; 2536.57,2969.77 2510.83,2961.61 ; 2536.57,3250.71 2510.83,3258.86 ; 2536.57,3267.01 2510.83,3258.86 ; 2536.57,3307.79 2510.83,3315.94 ; 2536.57,3324.1 2510.83,3315.94 ; 2536.57,3605.04 2510.83,3613.19 ; 2536.57,3621.34 2510.83,3613.19 ; 2536.57,3662.12 2510.83,3670.28 ; 2536.57,3678.43 2510.83,3670.28 ; 2536.57,3959.37 2510.83,3967.52 ; 2536.57,3975.67 2510.83,3967.52 ; 2536.57,4016.45 2510.83,4024.61 ; 2536.57,4032.76 2510.83,4024.61 ; 2536.57,4313.7 2510.83,4321.85 ; 2536.57,4330 2510.83,4321.85 ; 2536.57,4370.79 2510.83,4378.94 ; 2536.57,4387.09 2510.83,4378.94 ; 2536.57,4668.03 2510.83,4676.18 ; 2536.57,4684.33 2510.83,4676.18 ; 2536.57,4725.12 2510.83,4733.27 ; 2536.57,4741.42 2510.83,4733.27 ; 2537.83,1487.2 2510.83,1487.2 ; 2537.83,1544.29 2510.83,1544.29 ; 2537.83,2195.87 2510.83,2195.87 ; 2537.83,2252.95 2510.83,2252.95 ; 2537.83,2550.2 2510.83,2550.2 ; 2537.83,2607.28 2510.83,2607.28 ; 2537.83,2904.53 2510.83,2904.53 ; 2537.83,2961.61 2510.83,2961.61 ; 2537.83,3258.86 2510.83,3258.86 ; 2537.83,3315.94 2510.83,3315.94 ; 2537.83,3613.19 2510.83,3613.19 ; 2537.83,3670.28 2510.83,3670.28 ; 2537.83,3967.52 2510.83,3967.52 ; 2537.83,4024.61 2510.83,4024.61 ; 2537.83,4321.85 2510.83,4321.85 ; 2537.83,4378.94 2510.83,4378.94 ; 2537.83,4676.18 2510.83,4676.18 ; 2537.83,4733.27 2510.83,4733.27 ; 2551.61,1487.2 2510.83,1487.2 ; 2551.61,1544.29 2510.83,1544.29 ; 2551.61,2195.87 2510.83,2195.87 ; 2551.61,2252.95 2510.83,2252.95 ; 2551.61,2550.2 2510.83,2550.2 ; 2551.61,2607.28 2510.83,2607.28 ; 2551.61,2904.53 2510.83,2904.53 ; 2551.61,2961.61 2510.83,2961.61 ; 2551.61,3258.86 2510.83,3258.86 ; 2551.61,3315.94 2510.83,3315.94 ; 2551.61,3613.19 2510.83,3613.19 ; 2551.61,3670.28 2510.83,3670.28 ; 2551.61,3967.52 2510.83,3967.52 ; 2551.61,4024.61 2510.83,4024.61 ; 2551.61,4321.85 2510.83,4321.85 ; 2551.61,4378.94 2510.83,4378.94 ; 2551.61,4676.18 2510.83,4676.18 ; 2551.61,4733.27 2510.83,4733.27 ; v1(2627.95,1574.8) 2627.95,1555.12 2638.78,1544.29 ; v1(2627.95,2283.46) 2627.95,2263.78 2638.78,2252.95 ; v1(2627.95,2637.8) 2627.95,2618.11 2638.78,2607.28 ; v1(2627.95,2992.13) 2627.95,2972.44 2638.78,2961.61 ; v1(2627.95,3346.46) 2627.95,3326.77 2638.78,3315.94 ; v1(2627.95,3700.79) 2627.95,3681.1 2638.78,3670.28 ; v1(2627.95,4055.12) 2627.95,4035.43 2638.78,4024.61 ; v1(2627.95,4409.45) 2627.95,4389.76 2638.78,4378.94 ; v1(2627.95,4763.78) 2627.95,4744.09 2638.78,4733.27 ; 2669.77,1536.11 2638.78,1544.29 ; 2669.77,1552.47 2638.78,1544.29 ; 2669.77,2244.77 2638.78,2252.95 ; 2669.77,2261.13 2638.78,2252.95 ; 2669.77,2599.1 2638.78,2607.28 ; 2669.77,2615.46 2638.78,2607.28 ; 2669.77,2953.43 2638.78,2961.61 ; 2669.77,2969.79 2638.78,2961.61 ; 2669.77,3307.77 2638.78,3315.94 ; 2669.77,3324.12 2638.78,3315.94 ; 2669.77,3662.1 2638.78,3670.28 ; 2669.77,3678.45 2638.78,3670.28 ; 2669.77,4016.43 2638.78,4024.61 ; 2669.77,4032.79 2638.78,4024.61 ; 2669.77,4370.76 2638.78,4378.94 ; 2669.77,4387.12 2638.78,4378.94 ; 2669.77,4725.09 2638.78,4733.27 ; 2669.77,4741.45 2638.78,4733.27 ; 2670.83,1544.29 2638.78,1544.29 ; 2670.83,2252.95 2638.78,2252.95 ; 2670.83,2607.28 2638.78,2607.28 ; 2670.83,2961.61 2638.78,2961.61 ; 2670.83,3315.94 2638.78,3315.94 ; 2670.83,3670.28 2638.78,3670.28 ; 2670.83,4024.61 2638.78,4024.61 ; 2670.83,4378.94 2638.78,4378.94 ; 2670.83,4733.27 2638.78,4733.27 ; 2684.61,1487.2 2723.43,1487.2 ; 2684.61,1544.29 2638.78,1544.29 ; 2684.61,2195.87 2723.43,2195.87 ; 2684.61,2252.95 2638.78,2252.95 ; 2684.61,2550.2 2723.43,2550.2 ; 2684.61,2607.28 2638.78,2607.28 ; 2684.61,2904.53 2723.43,2904.53 ; 2684.61,2961.61 2638.78,2961.61 ; 2684.61,3258.86 2723.43,3258.86 ; 2684.61,3315.94 2638.78,3315.94 ; 2684.61,3613.19 2723.43,3613.19 ; 2684.61,3670.28 2638.78,3670.28 ; 2684.61,3967.52 2723.43,3967.52 ; 2684.61,4024.61 2638.78,4024.61 ; 2684.61,4321.85 2723.43,4321.85 ; 2684.61,4378.94 2638.78,4378.94 ; 2684.61,4676.18 2723.43,4676.18 ; 2684.61,4733.27 2638.78,4733.27 ; 2698.39,1487.2 2723.43,1487.2 ; 2698.39,2195.87 2723.43,2195.87 ; 2698.39,2550.2 2723.43,2550.2 ; 2698.39,2904.53 2723.43,2904.53 ; 2698.39,3258.86 2723.43,3258.86 ; 2698.39,3613.19 2723.43,3613.19 ; 2698.39,3967.52 2723.43,3967.52 ; 2698.39,4321.85 2723.43,4321.85 ; 2698.39,4676.18 2723.43,4676.18 ; 2699.75,1479.07 2723.43,1487.2 ; 2699.75,1495.34 2723.43,1487.2 ; 2699.75,2187.73 2723.43,2195.87 ; 2699.75,2204 2723.43,2195.87 ; 2699.75,2542.06 2723.43,2550.2 ; 2699.75,2558.33 2723.43,2550.2 ; 2699.75,2896.39 2723.43,2904.53 ; 2699.75,2912.66 2723.43,2904.53 ; 2699.75,3250.72 2723.43,3258.86 ; 2699.75,3266.99 2723.43,3258.86 ; 2699.75,3605.05 2723.43,3613.19 ; 2699.75,3621.32 2723.43,3613.19 ; 2699.75,3959.38 2723.43,3967.52 ; 2699.75,3975.65 2723.43,3967.52 ; 2699.75,4313.72 2723.43,4321.85 ; 2699.75,4329.99 2723.43,4321.85 ; 2699.75,4668.05 2723.43,4676.18 ; 2699.75,4684.32 2723.43,4676.18 ; 2773.08,1537.29 2746.06,1549.21 ; 2773.08,1561.14 2746.06,1549.21 ; 2773.08,2245.95 2746.06,2257.87 ; 2773.08,2269.8 2746.06,2257.87 ; 2773.08,2600.28 2746.06,2612.2 ; 2773.08,2624.13 2746.06,2612.2 ; 2773.08,2954.61 2746.06,2966.54 ; 2773.08,2978.46 2746.06,2966.54 ; 2773.08,3308.94 2746.06,3320.87 ; 2773.08,3332.79 2746.06,3320.87 ; 2773.08,3663.27 2746.06,3675.2 ; 2773.08,3687.12 2746.06,3675.2 ; 2773.08,4017.6 2746.06,4029.53 ; 2773.08,4041.45 2746.06,4029.53 ; 2773.08,4371.94 2746.06,4383.86 ; 2773.08,4395.78 2746.06,4383.86 ; 2773.08,4726.27 2746.06,4738.19 ; 2773.08,4750.11 2746.06,4738.19 ; 2849.03,1484.33 v1(2824.8,1446.85) ; 2849.03,1563.07 v1(2824.8,1525.59) ; 2849.03,2192.99 v1(2824.8,2155.51) ; 2849.03,2271.73 v1(2824.8,2234.25) ; 2849.03,2547.32 v1(2824.8,2509.84) ; 2849.03,2626.06 v1(2824.8,2588.58) ; 2849.03,2901.65 v1(2824.8,2864.17) ; 2849.03,2980.39 v1(2824.8,2942.91) ; 2849.03,3255.98 v1(2824.8,3218.5) ; 2849.03,3334.72 v1(2824.8,3297.24) ; 2849.03,3610.31 v1(2824.8,3572.83) ; 2849.03,3689.05 v1(2824.8,3651.57) ; 2849.03,3964.64 v1(2824.8,3927.17) ; 2849.03,4043.38 v1(2824.8,4005.91) ; 2849.03,4318.97 v1(2824.8,4281.5) ; 2849.03,4397.71 v1(2824.8,4360.24) ; 2849.03,4673.31 v1(2824.8,4635.83) ; 2849.03,4752.05 v1(2824.8,4714.57) ; 2858.27,1476.38 v1(2824.8,1446.85) ; 2858.27,1555.12 v1(2824.8,1525.59) ; 2858.27,2185.04 v1(2824.8,2155.51) ; 2858.27,2263.78 v1(2824.8,2234.25) ; 2858.27,2539.37 v1(2824.8,2509.84) ; 2858.27,2618.11 v1(2824.8,2588.58) ; 2858.27,2893.7 v1(2824.8,2864.17) ; 2858.27,2972.44 v1(2824.8,2942.91) ; 2858.27,3248.03 v1(2824.8,3218.5) ; 2858.27,3326.77 v1(2824.8,3297.24) ; 2858.27,3602.36 v1(2824.8,3572.83) ; 2858.27,3681.1 v1(2824.8,3651.57) ; 2858.27,3956.69 v1(2824.8,3927.17) ; 2858.27,4035.43 v1(2824.8,4005.91) ; 2858.27,4311.02 v1(2824.8,4281.5) ; 2858.27,4389.76 v1(2824.8,4360.24) ; 2858.27,4665.35 v1(2824.8,4635.83) ; 2858.27,4744.09 v1(2824.8,4714.57) ; 2860.24,1476.38 2854.33,1476.38 v1(2824.8,1446.85) ; 2860.24,1555.12 2854.33,1555.12 v1(2824.8,1525.59) ; 2860.24,2185.04 2854.33,2185.04 v1(2824.8,2155.51) ; 2860.24,2263.78 2854.33,2263.78 v1(2824.8,2234.25) ; 2860.24,2539.37 2854.33,2539.37 v1(2824.8,2509.84) ; 2860.24,2618.11 2854.33,2618.11 v1(2824.8,2588.58) ; 2860.24,2893.7 2854.33,2893.7 v1(2824.8,2864.17) ; 2860.24,2972.44 2854.33,2972.44 v1(2824.8,2942.91) ; 2860.24,3248.03 2854.33,3248.03 v1(2824.8,3218.5) ; 2860.24,3326.77 2854.33,3326.77 v1(2824.8,3297.24) ; 2860.24,3602.36 2854.33,3602.36 v1(2824.8,3572.83) ; 2860.24,3681.1 2854.33,3681.1 v1(2824.8,3651.57) ; 2860.24,3956.69 2854.33,3956.69 v1(2824.8,3927.17) ; 2860.24,4035.43 2854.33,4035.43 v1(2824.8,4005.91) ; 2860.24,4311.02 2854.33,4311.02 v1(2824.8,4281.5) ; 2860.24,4389.76 2854.33,4389.76 v1(2824.8,4360.24) ; 2860.24,4665.35 2854.33,4665.35 v1(2824.8,4635.83) ; 2860.24,4744.09 2854.33,4744.09 v1(2824.8,4714.57) ; 2865.01,1466.23 v1(2824.8,1446.85) ; 2865.01,1544.97 v1(2824.8,1525.59) ; 2865.01,2174.89 v1(2824.8,2155.51) ; 2865.01,2253.63 v1(2824.8,2234.25) ; 2865.01,2529.22 v1(2824.8,2509.84) ; 2865.01,2607.96 v1(2824.8,2588.58) ; 2865.01,2883.55 v1(2824.8,2864.17) ; 2865.01,2962.29 v1(2824.8,2942.91) ; 2865.01,3237.88 v1(2824.8,3218.5) ; 2865.01,3316.62 v1(2824.8,3297.24) ; 2865.01,3592.21 v1(2824.8,3572.83) ; 2865.01,3670.95 v1(2824.8,3651.57) ; 2865.01,3946.54 v1(2824.8,3927.17) ; 2865.01,4025.28 v1(2824.8,4005.91) ; 2865.01,4300.87 v1(2824.8,4281.5) ; 2865.01,4379.61 v1(2824.8,4360.24) ; 2865.01,4655.2 v1(2824.8,4635.83) ; 2865.01,4733.94 v1(2824.8,4714.57) ; 2927.17,1476.38 2952.76,1476.38 ; 2927.17,1555.12 2952.76,1555.12 ; 2927.17,2185.04 2952.76,2185.04 ; 2927.17,2263.78 2952.76,2263.78 ; 2927.17,2539.37 2952.76,2539.37 ; 2927.17,2618.11 2952.76,2618.11 ; 2927.17,2893.7 2952.76,2893.7 ; 2927.17,2972.44 2952.76,2972.44 ; 2927.17,3248.03 2952.76,3248.03 ; 2927.17,3326.77 2952.76,3326.77 ; 2927.17,3602.36 2952.76,3602.36 ; 2927.17,3681.1 2952.76,3681.1 ; 2927.17,3956.69 2952.76,3956.69 ; 2927.17,4035.43 2952.76,4035.43 ; 2927.17,4311.02 2952.76,4311.02 ; 2927.17,4389.76 2952.76,4389.76 ; 2927.17,4665.35 2952.76,4665.35 ; 2927.17,4744.09 2952.76,4744.09 ; 2927.49,1488.45 2963.58,1487.2 ; 2927.49,1543.04 2963.58,1544.29 ; 2927.49,2197.11 2963.58,2195.87 ; 2927.49,2251.71 2963.58,2252.95 ; 2927.49,2551.44 2963.58,2550.2 ; 2927.49,2606.04 2963.58,2607.28 ; 2927.49,2905.78 2963.58,2904.53 ; 2927.49,2960.37 2963.58,2961.61 ; 2927.49,3260.11 2963.58,3258.86 ; 2927.49,3314.7 2963.58,3315.94 ; 2927.49,3614.44 2963.58,3613.19 ; 2927.49,3669.03 2963.58,3670.28 ; 2927.49,3968.77 2963.58,3967.52 ; 2927.49,4023.36 2963.58,4024.61 ; 2927.49,4323.1 2963.58,4321.85 ; 2927.49,4377.69 2963.58,4378.94 ; 2927.49,4677.43 2963.58,4676.18 ; 2927.49,4732.02 2963.58,4733.27 ; 2934.7,1465.54 2963.58,1487.2 ; 2934.7,1565.96 2963.58,1544.29 ; 2934.7,2174.2 2963.58,2195.87 ; 2934.7,2274.62 2963.58,2252.95 ; 2934.7,2528.53 2963.58,2550.2 ; 2934.7,2628.95 2963.58,2607.28 ; 2934.7,2882.86 2963.58,2904.53 ; 2934.7,2983.28 2963.58,2961.61 ; 2934.7,3237.19 2963.58,3258.86 ; 2934.7,3337.61 2963.58,3315.94 ; 2934.7,3591.52 2963.58,3613.19 ; 2934.7,3691.94 2963.58,3670.28 ; 2934.7,3945.85 2963.58,3967.52 ; 2934.7,4046.27 2963.58,4024.61 ; 2934.7,4300.18 2963.58,4321.85 ; 2934.7,4400.61 2963.58,4378.94 ; 2934.7,4654.51 2963.58,4676.18 ; 2934.7,4754.94 2963.58,4733.27 ; 2989.33,1479.05 2963.58,1487.2 ; 2989.33,1495.36 2963.58,1487.2 ; 2989.33,1536.14 2963.58,1544.29 ; 2989.33,1552.44 2963.58,1544.29 ; 2989.33,2187.71 2963.58,2195.87 ; 2989.33,2204.02 2963.58,2195.87 ; 2989.33,2244.8 2963.58,2252.95 ; 2989.33,2261.1 2963.58,2252.95 ; 2989.33,2542.05 2963.58,2550.2 ; 2989.33,2558.35 2963.58,2550.2 ; 2989.33,2599.13 2963.58,2607.28 ; 2989.33,2615.43 2963.58,2607.28 ; 2989.33,2896.38 2963.58,2904.53 ; 2989.33,2912.68 2963.58,2904.53 ; 2989.33,2953.46 2963.58,2961.61 ; 2989.33,2969.77 2963.58,2961.61 ; 2989.33,3250.71 2963.58,3258.86 ; 2989.33,3267.01 2963.58,3258.86 ; 2989.33,3307.79 2963.58,3315.94 ; 2989.33,3324.1 2963.58,3315.94 ; 2989.33,3605.04 2963.58,3613.19 ; 2989.33,3621.34 2963.58,3613.19 ; 2989.33,3662.12 2963.58,3670.28 ; 2989.33,3678.43 2963.58,3670.28 ; 2989.33,3959.37 2963.58,3967.52 ; 2989.33,3975.67 2963.58,3967.52 ; 2989.33,4016.45 2963.58,4024.61 ; 2989.33,4032.76 2963.58,4024.61 ; 2989.33,4313.7 2963.58,4321.85 ; 2989.33,4330 2963.58,4321.85 ; 2989.33,4370.79 2963.58,4378.94 ; 2989.33,4387.09 2963.58,4378.94 ; 2989.33,4668.03 2963.58,4676.18 ; 2989.33,4684.33 2963.58,4676.18 ; 2989.33,4725.12 2963.58,4733.27 ; 2989.33,4741.42 2963.58,4733.27 ; 2990.59,1487.2 2963.58,1487.2 ; 2990.59,1544.29 2963.58,1544.29 ; 2990.59,2195.87 2963.58,2195.87 ; 2990.59,2252.95 2963.58,2252.95 ; 2990.59,2550.2 2963.58,2550.2 ; 2990.59,2607.28 2963.58,2607.28 ; 2990.59,2904.53 2963.58,2904.53 ; 2990.59,2961.61 2963.58,2961.61 ; 2990.59,3258.86 2963.58,3258.86 ; 2990.59,3315.94 2963.58,3315.94 ; 2990.59,3613.19 2963.58,3613.19 ; 2990.59,3670.28 2963.58,3670.28 ; 2990.59,3967.52 2963.58,3967.52 ; 2990.59,4024.61 2963.58,4024.61 ; 2990.59,4321.85 2963.58,4321.85 ; 2990.59,4378.94 2963.58,4378.94 ; 2990.59,4676.18 2963.58,4676.18 ; 2990.59,4733.27 2963.58,4733.27 ; 3004.37,1487.2 2963.58,1487.2 ; 3004.37,1544.29 2963.58,1544.29 ; 3004.37,2195.87 2963.58,2195.87 ; 3004.37,2252.95 2963.58,2252.95 ; 3004.37,2550.2 2963.58,2550.2 ; 3004.37,2607.28 2963.58,2607.28 ; 3004.37,2904.53 2963.58,2904.53 ; 3004.37,2961.61 2963.58,2961.61 ; 3004.37,3258.86 2963.58,3258.86 ; 3004.37,3315.94 2963.58,3315.94 ; 3004.37,3613.19 2963.58,3613.19 ; 3004.37,3670.28 2963.58,3670.28 ; 3004.37,3967.52 2963.58,3967.52 ; 3004.37,4024.61 2963.58,4024.61 ; 3004.37,4321.85 2963.58,4321.85 ; 3004.37,4378.94 2963.58,4378.94 ; 3004.37,4676.18 2963.58,4676.18 ; 3004.37,4733.27 2963.58,4733.27 ; v1(3080.71,1574.8) 3080.71,1555.12 3091.54,1544.29 ; v1(3080.71,2283.46) 3080.71,2263.78 3091.54,2252.95 ; v1(3080.71,2637.8) 3080.71,2618.11 3091.54,2607.28 ; v1(3080.71,2992.13) 3080.71,2972.44 3091.54,2961.61 ; v1(3080.71,3346.46) 3080.71,3326.77 3091.54,3315.94 ; v1(3080.71,3700.79) 3080.71,3681.1 3091.54,3670.28 ; v1(3080.71,4055.12) 3080.71,4035.43 3091.54,4024.61 ; v1(3080.71,4409.45) 3080.71,4389.76 3091.54,4378.94 ; v1(3080.71,4763.78) 3080.71,4744.09 3091.54,4733.27 ; 3122.53,1536.11 3091.54,1544.29 ; 3122.53,1552.47 3091.54,1544.29 ; 3122.53,2244.77 3091.54,2252.95 ; 3122.53,2261.13 3091.54,2252.95 ; 3122.53,2599.1 3091.54,2607.28 ; 3122.53,2615.46 3091.54,2607.28 ; 3122.53,2953.43 3091.54,2961.61 ; 3122.53,2969.79 3091.54,2961.61 ; 3122.53,3307.77 3091.54,3315.94 ; 3122.53,3324.12 3091.54,3315.94 ; 3122.53,3662.1 3091.54,3670.28 ; 3122.53,3678.45 3091.54,3670.28 ; 3122.53,4016.43 3091.54,4024.61 ; 3122.53,4032.79 3091.54,4024.61 ; 3122.53,4370.76 3091.54,4378.94 ; 3122.53,4387.12 3091.54,4378.94 ; 3122.53,4725.09 3091.54,4733.27 ; 3122.53,4741.45 3091.54,4733.27 ; 3123.59,1544.29 3091.54,1544.29 ; 3123.59,2252.95 3091.54,2252.95 ; 3123.59,2607.28 3091.54,2607.28 ; 3123.59,2961.61 3091.54,2961.61 ; 3123.59,3315.94 3091.54,3315.94 ; 3123.59,3670.28 3091.54,3670.28 ; 3123.59,4024.61 3091.54,4024.61 ; 3123.59,4378.94 3091.54,4378.94 ; 3123.59,4733.27 3091.54,4733.27 ; 3137.37,1487.2 3176.18,1487.2 ; 3137.37,1544.29 3091.54,1544.29 ; 3137.37,2195.87 3176.18,2195.87 ; 3137.37,2252.95 3091.54,2252.95 ; 3137.37,2550.2 3176.18,2550.2 ; 3137.37,2607.28 3091.54,2607.28 ; 3137.37,2904.53 3176.18,2904.53 ; 3137.37,2961.61 3091.54,2961.61 ; 3137.37,3258.86 3176.18,3258.86 ; 3137.37,3315.94 3091.54,3315.94 ; 3137.37,3613.19 3176.18,3613.19 ; 3137.37,3670.28 3091.54,3670.28 ; 3137.37,3967.52 3176.18,3967.52 ; 3137.37,4024.61 3091.54,4024.61 ; 3137.37,4321.85 3176.18,4321.85 ; 3137.37,4378.94 3091.54,4378.94 ; 3137.37,4676.18 3176.18,4676.18 ; 3137.37,4733.27 3091.54,4733.27 ; 3151.15,1487.2 3176.18,1487.2 ; 3151.15,2195.87 3176.18,2195.87 ; 3151.15,2550.2 3176.18,2550.2 ; 3151.15,2904.53 3176.18,2904.53 ; 3151.15,3258.86 3176.18,3258.86 ; 3151.15,3613.19 3176.18,3613.19 ; 3151.15,3967.52 3176.18,3967.52 ; 3151.15,4321.85 3176.18,4321.85 ; 3151.15,4676.18 3176.18,4676.18 ; 3152.5,1479.07 3176.18,1487.2 ; 3152.5,1495.34 3176.18,1487.2 ; 3152.5,2187.73 3176.18,2195.87 ; 3152.5,2204 3176.18,2195.87 ; 3152.5,2542.06 3176.18,2550.2 ; 3152.5,2558.33 3176.18,2550.2 ; 3152.5,2896.39 3176.18,2904.53 ; 3152.5,2912.66 3176.18,2904.53 ; 3152.5,3250.72 3176.18,3258.86 ; 3152.5,3266.99 3176.18,3258.86 ; 3152.5,3605.05 3176.18,3613.19 ; 3152.5,3621.32 3176.18,3613.19 ; 3152.5,3959.38 3176.18,3967.52 ; 3152.5,3975.65 3176.18,3967.52 ; 3152.5,4313.72 3176.18,4321.85 ; 3152.5,4329.99 3176.18,4321.85 ; 3152.5,4668.05 3176.18,4676.18 ; 3152.5,4684.32 3176.18,4676.18 ; 3225.83,1537.29 3198.82,1549.21 ; 3225.83,1561.14 3198.82,1549.21 ; 3225.83,2245.95 3198.82,2257.87 ; 3225.83,2269.8 3198.82,2257.87 ; 3225.83,2600.28 3198.82,2612.2 ; 3225.83,2624.13 3198.82,2612.2 ; 3225.83,2954.61 3198.82,2966.54 ; 3225.83,2978.46 3198.82,2966.54 ; 3225.83,3308.94 3198.82,3320.87 ; 3225.83,3332.79 3198.82,3320.87 ; 3225.83,3663.27 3198.82,3675.2 ; 3225.83,3687.12 3198.82,3675.2 ; 3225.83,4017.6 3198.82,4029.53 ; 3225.83,4041.45 3198.82,4029.53 ; 3225.83,4371.94 3198.82,4383.86 ; 3225.83,4395.78 3198.82,4383.86 ; 3225.83,4726.27 3198.82,4738.19 ; 3225.83,4750.11 3198.82,4738.19 ; 1551.18,1476.38 1574.8,1476.38 ; 1551.18,1476.38 1585.63,1487.2 ; 1551.18,1476.38 1574.8,1476.38 ; 1551.18,1555.12 1585.63,1544.29 ; 1551.18,1555.12 1574.8,1555.12 ; 1551.18,1555.12 1574.8,1555.12 ; 1551.18,2185.04 1574.8,2185.04 ; 1551.18,2185.04 1585.63,2195.87 ; 1551.18,2185.04 1574.8,2185.04 ; 1551.18,2263.78 1574.8,2263.78 ; 1551.18,2263.78 1574.8,2263.78 ; 1551.18,2263.78 1585.63,2252.95 ; 1551.18,2539.37 1574.8,2539.37 ; 1551.18,2539.37 1585.63,2550.2 ; 1551.18,2539.37 1574.8,2539.37 ; 1551.18,2618.11 1585.63,2607.28 ; 1551.18,2618.11 1574.8,2618.11 ; 1551.18,2618.11 1574.8,2618.11 ; 1551.18,2893.7 1574.8,2893.7 ; 1551.18,2893.7 1585.63,2904.53 ; 1551.18,2893.7 1574.8,2893.7 ; 1551.18,2972.44 1574.8,2972.44 ; 1551.18,2972.44 1574.8,2972.44 ; 1551.18,2972.44 1585.63,2961.61 ; 1551.18,3248.03 1574.8,3248.03 ; 1551.18,3248.03 1585.63,3258.86 ; 1551.18,3248.03 1574.8,3248.03 ; 1551.18,3326.77 1585.63,3315.94 ; 1551.18,3326.77 1574.8,3326.77 ; 1551.18,3326.77 1574.8,3326.77 ; 1551.18,3602.36 1574.8,3602.36 ; 1551.18,3602.36 1585.63,3613.19 ; 1551.18,3602.36 1574.8,3602.36 ; 1551.18,3681.1 1585.63,3670.28 ; 1551.18,3681.1 1574.8,3681.1 ; 1551.18,3681.1 1574.8,3681.1 ; 1551.18,3956.69 1574.8,3956.69 ; 1551.18,3956.69 1585.63,3967.52 ; 1551.18,3956.69 1574.8,3956.69 ; 1551.18,4035.43 1574.8,4035.43 ; 1551.18,4035.43 1574.8,4035.43 ; 1551.18,4035.43 1585.63,4024.61 ; 1551.18,4311.02 1574.8,4311.02 ; 1551.18,4311.02 1585.63,4321.85 ; 1551.18,4311.02 1574.8,4311.02 ; 1551.18,4389.76 1574.8,4389.76 ; 1551.18,4389.76 1574.8,4389.76 ; 1551.18,4389.76 1585.63,4378.94 ; 1551.18,4665.35 1574.8,4665.35 ; 1551.18,4665.35 1585.63,4676.18 ; 1551.18,4665.35 1574.8,4665.35 ; 1551.18,4744.09 1585.63,4733.27 ; 1551.18,4744.09 1574.8,4744.09 ; 1551.18,4744.09 1574.8,4744.09 ; 1574.8,1476.38 1585.63,1487.2 ; 1574.8,1476.38 1554.32,1488.15 1574.8,1476.38 ; 1574.8,1476.38 1554.32,1464.61 1574.8,1476.38 ; 1574.8,1555.12 1585.63,1544.29 ; 1574.8,1555.12 1554.32,1566.89 1574.8,1555.12 ; 1574.8,1555.12 1554.32,1543.35 1574.8,1555.12 ; 1574.8,2185.04 1554.32,2173.27 1574.8,2185.04 ; 1574.8,2185.04 1554.32,2196.81 1574.8,2185.04 ; 1574.8,2185.04 1585.63,2195.87 ; 1574.8,2263.78 1554.32,2252.01 1574.8,2263.78 ; 1574.8,2263.78 1554.32,2275.55 1574.8,2263.78 ; 1574.8,2263.78 1585.63,2252.95 ; 1574.8,2539.37 1585.63,2550.2 ; 1574.8,2539.37 1554.32,2551.14 1574.8,2539.37 ; 1574.8,2539.37 1554.32,2527.6 1574.8,2539.37 ; 1574.8,2618.11 1585.63,2607.28 ; 1574.8,2618.11 1554.32,2629.88 1574.8,2618.11 ; 1574.8,2618.11 1554.32,2606.34 1574.8,2618.11 ; 1574.8,2893.7 1554.32,2881.93 1574.8,2893.7 ; 1574.8,2893.7 1554.32,2905.47 1574.8,2893.7 ; 1574.8,2893.7 1585.63,2904.53 ; 1574.8,2972.44 1554.32,2960.67 1574.8,2972.44 ; 1574.8,2972.44 1554.32,2984.21 1574.8,2972.44 ; 1574.8,2972.44 1585.63,2961.61 ; 1574.8,3248.03 1585.63,3258.86 ; 1574.8,3248.03 1554.32,3259.8 1574.8,3248.03 ; 1574.8,3248.03 1554.32,3236.26 1574.8,3248.03 ; 1574.8,3326.77 1585.63,3315.94 ; 1574.8,3326.77 1554.32,3338.54 1574.8,3326.77 ; 1574.8,3326.77 1554.32,3315 1574.8,3326.77 ; 1574.8,3602.36 1585.63,3613.19 ; 1574.8,3602.36 1554.32,3614.14 1574.8,3602.36 ; 1574.8,3602.36 1554.32,3590.59 1574.8,3602.36 ; 1574.8,3681.1 1585.63,3670.28 ; 1574.8,3681.1 1554.32,3692.88 1574.8,3681.1 ; 1574.8,3681.1 1554.32,3669.33 1574.8,3681.1 ; 1574.8,3956.69 1554.32,3944.92 1574.8,3956.69 ; 1574.8,3956.69 1554.32,3968.47 1574.8,3956.69 ; 1574.8,3956.69 1585.63,3967.52 ; 1574.8,4035.43 1554.32,4023.66 1574.8,4035.43 ; 1574.8,4035.43 1554.32,4047.21 1574.8,4035.43 ; 1574.8,4035.43 1585.63,4024.61 ; 1574.8,4311.02 1554.32,4299.25 1574.8,4311.02 ; 1574.8,4311.02 1554.32,4322.8 1574.8,4311.02 ; 1574.8,4311.02 1585.63,4321.85 ; 1574.8,4389.76 1554.32,4377.99 1574.8,4389.76 ; 1574.8,4389.76 1554.32,4401.54 1574.8,4389.76 ; 1574.8,4389.76 1585.63,4378.94 ; 1574.8,4665.35 1585.63,4676.18 ; 1574.8,4665.35 1554.32,4677.13 1574.8,4665.35 ; 1574.8,4665.35 1554.32,4653.58 1574.8,4665.35 ; 1574.8,4744.09 1585.63,4733.27 ; 1574.8,4744.09 1554.32,4755.87 1574.8,4744.09 ; 1574.8,4744.09 1554.32,4732.32 1574.8,4744.09 ; 1798.23,1487.2 1811.02,1500 1811.02,1539.37 1820.87,1549.21 ; 1798.23,2195.87 1811.02,2208.66 1811.02,2248.03 1820.87,2257.87 ; 1798.23,2550.2 1811.02,2562.99 1811.02,2602.36 1820.87,2612.2 ; 1798.23,2904.53 1811.02,2917.32 1811.02,2956.69 1820.87,2966.54 ; 1798.23,3258.86 1811.02,3271.65 1811.02,3311.02 1820.87,3320.87